# Altium PCB 剥皮器20200614.PCBDOC (part 2 of 2)
Units mil, origin at the board's own origin, x right, y up, seen from the top; angles counter-clockwise.
Board outline 5515.78 x 3626.02 mil, 4 copper layers (Top Layer, MidLayer1, MidLayer2, Bottom Layer); 100 components, 73 nets, 328 pads, 459 vias.
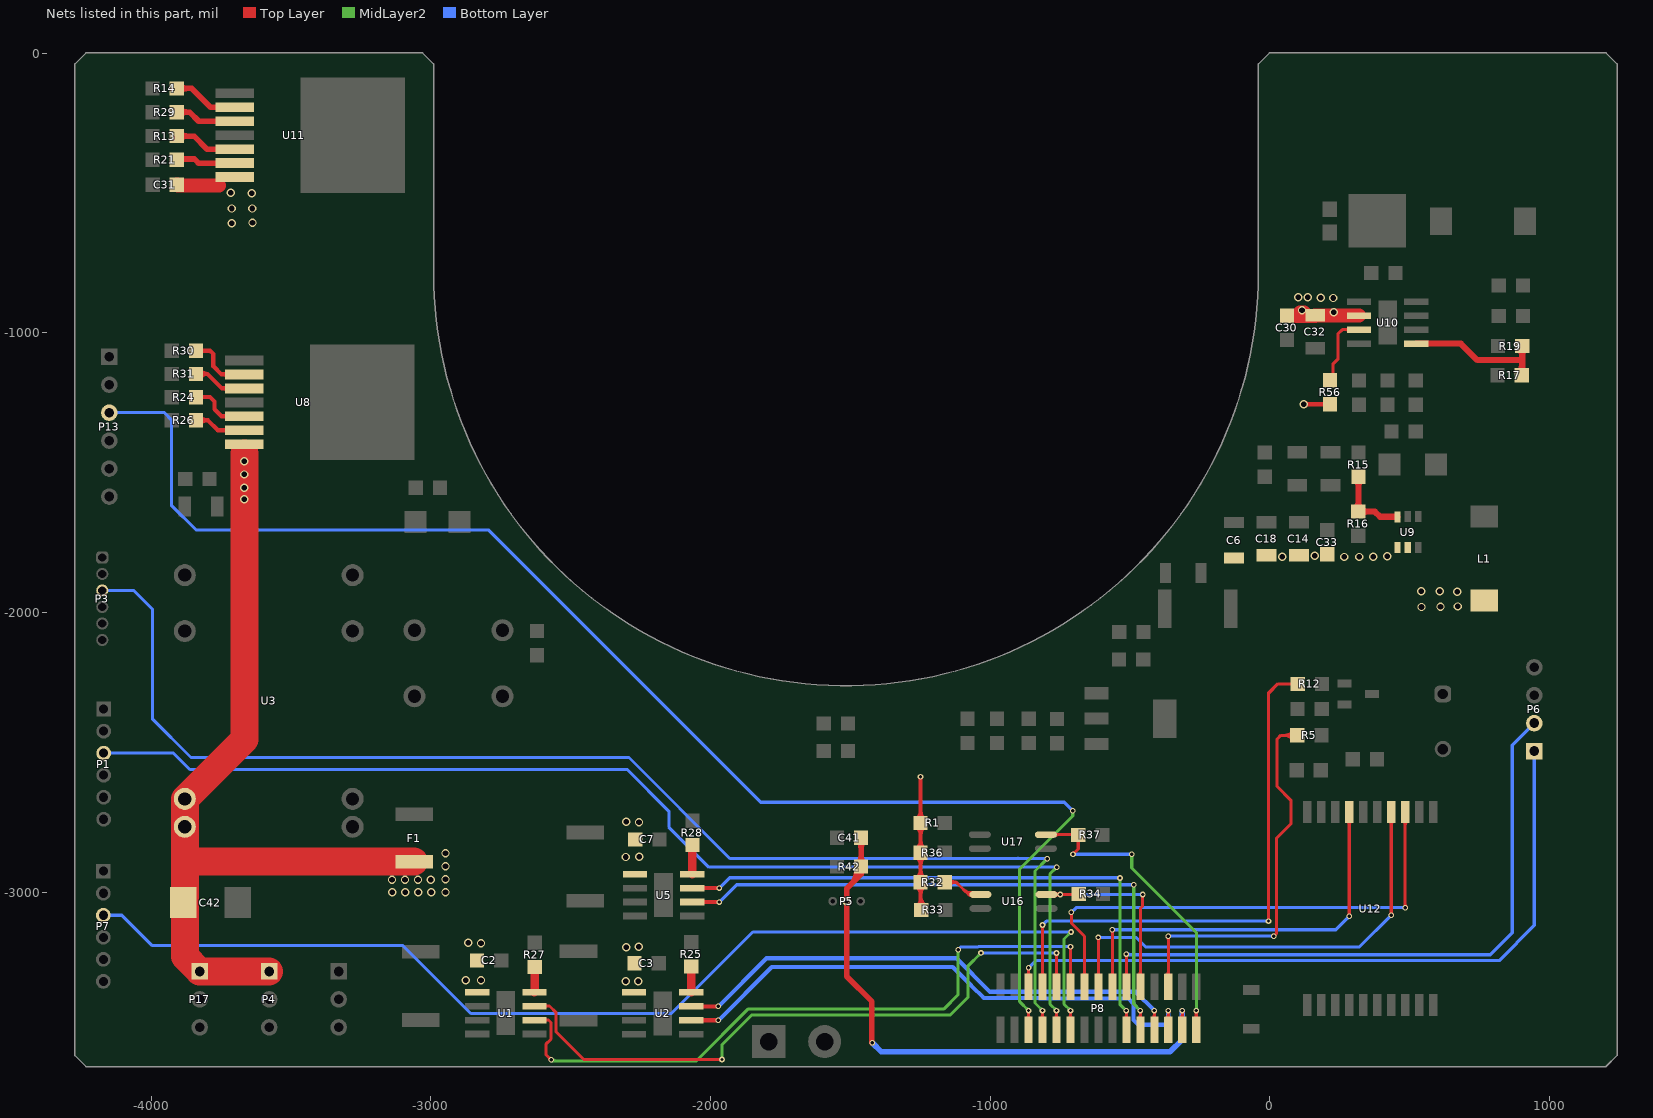
[diagram p4: the nets of this part, all layers, seen from the top]

## Via types
v1: diameter 30, hole 20, Top Layer to Bottom Layer, tented both sides, 193 vias
v2: diameter 20, hole 12, Top Layer to Bottom Layer, tented both sides, 148 vias
v3: diameter 40, hole 25, Top Layer to Bottom Layer, tented both sides, 118 vias

## Nets (pads, with @x,y where several pads share a name; then routed paths per layer and width w, separated by ;. In a path a pad name is that pad's centre, name@x,y a point inside that pad or via, vN(x,y) a via of type N, cw(c..) or ccw(c..) an arc to the next point about the centre after c; other vN are vias at no path point) (continued)
NetR13_2: R13.2 U11.5 | length 315.4
  Top Layer w20: R13.2@-3908.87,-296.01 -3846.99,-296.01 -3800,-343 U11.5@-3701,-343 ; R13.2@-3897.91,-306.97 cw(c-3871.45,-333.43) -3871.45,-296.01 cw(c-3871.45,-258.59) R13.2@-3897.91,-285.05 ; U11.5@-3757.64,-348.46 ccw(c-3770.81,-361.63) -3770.81,-343 ccw(c-3770.81,-324.37) U11.5@-3757.64,-337.54
NetR14_1: R14.1 U11.2 | length 323.8
  Top Layer w20: R14.1@-3908.87,-125.69 -3855.31,-125.69 -3788,-193 U11.2@-3701,-193 ; R14.1@-3897.91,-136.65 cw(c-3871.45,-163.11) -3871.45,-125.69 cw(c-3871.45,-88.27) R14.1@-3897.91,-114.73 ; U11.2@-3757.64,-198.46 ccw(c-3770.81,-211.63) -3770.81,-193 ccw(c-3770.81,-174.37) U11.2@-3757.64,-187.54
NetR15_2: R15.2 R16.1 U9.3 | length 439
  Top Layer w21.65: R16.1@305.62,-1628.32 ccw(c278.16,-1600.85) 317,-1600.85 ; R15.2@306.62,-1524.68 cw(c281.58,-1549.73) 317,-1549.73 cw(c352.42,-1549.73) R15.2@327.38,-1524.68 ; 317,-1605.68 ccw(c349.01,-1605.68) 326.38,-1628.32 ccw(c351.42,-1603.27) 351.42,-1638.69 ccw(c351.42,-1674.12) R16.1@326.38,-1649.07 ; R15.2@317,-1514.31 317,-1637.69 R16.1@316,-1638.69 375.69,-1638.69 394.28,-1657.28 U9.3@455.6,-1657.28
NetR17_1: R17.1 R19.2 U10.5 | length 619.5
  Top Layer w21.65: U10.5@523.36,-1038 683,-1038 742,-1097 902.31,-1097 ; R17.1@889.93,-1140.62 ccw(c860.05,-1110.75) 902.31,-1110.75 ; R19.2@891.93,-1057.38 cw(c866.88,-1082.42) 902.31,-1082.42 cw(c937.73,-1082.42) R19.2@912.68,-1057.38 ; R17.1@900.31,-1151 902.31,-1149 902.31,-1097 ; 902.31,-1120.4 ccw(c930.9,-1120.4) R17.1@910.68,-1140.62 ; R19.2@902.31,-1047 902.31,-1097
NetR21_2: R21.2 U11.6 | length 244.5
  Top Layer w20: R21.2@-3908.87,-380.69 -3906.18,-378 -3846,-378 -3831,-393 U11.6@-3701,-393 ; U11.6@-3757.64,-398.46 ccw(c-3770.81,-411.63) -3770.81,-393 ccw(c-3770.81,-374.37) U11.6@-3757.64,-387.54
NetR24_2: R24.2 U8.5 | length 256.8
  Top Layer w15: R24.2@-3840.31,-1229.5 -3789.5,-1229.5 -3774,-1245 -3774,-1273 -3749,-1298 U8.5@-3667,-1298 ; U8.5@-3725.41,-1305.22 ccw(c-3742.85,-1322.66) -3742.85,-1298 ccw(c-3742.85,-1273.34) U8.5@-3725.41,-1290.78
NetR25_2: R25.2 U2.4 | length 92.7
  Top Layer w30: R25.2@-2069,-3265.31 -2069,-3357.95 U2.4@-2068.94,-3358
NetR26_2: R26.2 U8.6 | length 293.5
  Top Layer w15: R26.2@-3840.31,-1312.5 -3797.5,-1312.5 ; R26.2@-3827.44,-1325.09 cw(c-3797.5,-1354.4) -3797.5,-1312.5 ; R26.2@-3827.44,-1299.91 ccw(c-3797.5,-1270.6) -3797.5,-1312.5 ; U8.6@-3725.41,-1355.22 ccw(c-3742.85,-1372.66) -3742.85,-1348 ccw(c-3742.85,-1323.34) U8.6@-3725.41,-1340.78 ; U8.6@-3667,-1348 -3762,-1348 -3797.5,-1312.5
NetR27_2: R27.2 U1.4 | length 90.1
  Top Layer w30: U1.4@-2629.94,-3357 -2629,-3356.06 R27.2@-2629,-3267.31
NetR28_2: R28.2 U5.4 | length 125.6
  Top Layer w30: U5.4@-2065.64,-2935 -2065.64,-2831.95 R28.2@-2065,-2831.31 ; -2065.64,-2858.2 cw(c-2038.11,-2858.2) R28.2@-2057.58,-2838.73
NetR29_1: R29.1 U11.3 | length 309.4
  Top Layer w20: R29.1@-3908.87,-210.38 -3862.62,-210.38 -3830,-243 U11.3@-3701,-243 ; R29.1@-3897.91,-221.34 cw(c-3871.45,-247.8) -3871.45,-210.38 cw(c-3871.45,-172.96) R29.1@-3897.91,-199.42 ; U11.3@-3757.64,-248.46 ccw(c-3770.81,-261.63) -3770.81,-243 ccw(c-3770.81,-224.37) U11.3@-3757.64,-237.54
NetR30_2: R30.2 U8.2 | length 272.8
  Top Layer w11.02: R30.2@-3840.31,-1063.5 R30.2@-3830,-1063.5
  Top Layer w15: R30.2@-3830,-1063.5 -3789.5,-1063.5 -3778,-1075 -3778,-1119 -3749,-1148 U8.2@-3667,-1148 ; U8.2@-3725.41,-1155.22 ccw(c-3742.85,-1172.66) -3742.85,-1148 ccw(c-3742.85,-1123.34) U8.2@-3725.41,-1140.78
NetR31_2: R31.2 U8.3 | length 297.7
  Top Layer w15: R31.2@-3840.31,-1146.5 -3798.5,-1146.5 ; R31.2@-3827.23,-1158.87 cw(c-3798.5,-1186.05) -3798.5,-1146.5 ; R31.2@-3827.23,-1134.13 ccw(c-3798.5,-1106.95) -3798.5,-1146.5 ; U8.3@-3725.41,-1205.22 ccw(c-3742.85,-1222.66) -3742.85,-1198 ccw(c-3742.85,-1173.34) U8.3@-3725.41,-1190.78 ; U8.3@-3667,-1198 -3747,-1198 -3798.5,-1146.5
NetR32_2: R32.2 U16.1 | length 307.4
  Top Layer w11.02: R32.2@-1162.69,-2964 -1122,-2964 ; R32.2@-1146.87,-2976.22 cw(c-1122,-2995.42) -1122,-2964 ; R32.2@-1146.87,-2951.78 ccw(c-1122,-2932.58) -1122,-2964 ; -1097.05,-2988.95 ccw(c-1066,-2957.91) U16.1@-1063.09,-3001.71 ; -1088,-2998 -1104.71,-2981.29 ; -1079.87,-3006.13 ccw(c-1063.86,-2990.13) U16.1@-1062.36,-3012.71 ; U16.1@-1067.12,-3012.45 ccw(c-1077.88,-3023.21) -1077.88,-3008 ccw(c-1077.88,-2992.79) U16.1@-1067.12,-3003.55 ; U16.1@-1035.11,-3008 -1078,-3008 -1104.71,-2981.29 ; -1122,-2964 -1104.71,-2981.29
NetR56_1: R56.1 U10.3 | length 282.4
  Top Layer w11.02: R56.1@215,-1168.69 225,-1158.69 225,-1112 243,-1094 243,-1004 259,-988 U10.3@318.64,-988 ; U10.3@282.69,-992.45 ccw(c271.93,-1003.21) 271.93,-988 ccw(c271.93,-972.79) U10.3@282.69,-983.55
P1_A: P1.3 P8.9 | length 4349.9
  Top Layer w11.02: P8.9@-769.59,-3452.76 ccw(c-785.05,-3437.31) -763.19,-3437.31 ccw(c-741.33,-3437.31) P8.9@-756.79,-3452.76 ; v2@-766.17,-3426.17 cw(c-773.38,-3433.38) -763.19,-3433.38 ; P8.9@-763.19,-3491.84 -763.19,-3423.19 v2(-763,-3423) ; -763.19,-3434.29 cw(c-751.71,-3434.29) v2@-759.83,-3426.17
  MidLayer2 w11.02: v2@-767.49,-3423 ccw(c-778.32,-3423) -770.66,-3415.34 ccw(c-763,-3407.68) v2@-763,-3418.51 ; v2@-766.49,-2910 cw(c-777.32,-2910) -769.66,-2917.66 cw(c-762,-2925.32) v2@-762,-2914.49 ; v2(-763,-3423) -786,-3400 -786,-2934 v2(-762,-2910)
  Bottom Layer w11.02: P1.3@-4169.99,-2502.75 -3920.25,-2502.75 -3862,-2561 -2298,-2561 -2149,-2710 -2149,-2767 -2006,-2910 -825,-2910 ; -789,-2910 -825,-2910 ; v2@-765.17,-2913.17 ccw(c-772.84,-2920.84) -772.84,-2910 ccw(c-772.84,-2899.16) v2@-765.17,-2906.83 ; v2(-762,-2910) -825,-2910
P7_A: P7.3 P8.11 | length 4348.1
  Top Layer w11.02: P8.11@-719.59,-3452.76 ccw(c-735.05,-3437.31) -713.19,-3437.31 ccw(c-691.33,-3437.31) P8.11@-706.79,-3452.76 ; v2@-716.17,-3426.17 cw(c-723.38,-3433.38) -713.19,-3433.38 ; P8.11@-713.19,-3491.84 -713.19,-3423.19 v2(-713,-3423) ; -713.19,-3434.29 cw(c-701.71,-3434.29) v2@-709.83,-3426.17
  MidLayer2 w11.02: v2@-717.49,-3423 ccw(c-728.32,-3423) -720.66,-3415.34 ccw(c-713,-3407.68) v2@-713,-3418.51 ; v2@-715.49,-3142 cw(c-726.32,-3142) -718.66,-3149.66 cw(c-711,-3157.32) v2@-711,-3146.49 ; v2(-713,-3423) -736,-3400 -736,-3167 v2(-711,-3142)
  Bottom Layer w11.02: P7.3@-4171.51,-3082.23 -4105,-3082.23 -3996.23,-3191 -3099.82,-3191 -2857.22,-3433.6 -2140.6,-3433.6 -1849,-3142 -1056,-3142 ; -1034,-3142 -1056,-3142 ; -735,-3142 -862,-3142 ; v2@-714.17,-3145.17 ccw(c-721.84,-3152.84) -721.84,-3142 ccw(c-721.84,-3131.16) v2@-714.17,-3138.83 ; v2(-711,-3142) -862,-3142 ; -1056,-3142 -862,-3142
P13_A: P8.5 P13.3 | length 5191.9
  Top Layer w11.02: P8.5@-869.59,-3452.76 ccw(c-885.05,-3437.31) -863.19,-3437.31 ccw(c-841.33,-3437.31) P8.5@-856.79,-3452.76 ; v2@-866.17,-3426.17 cw(c-873.38,-3433.38) -863.19,-3433.38 ; P8.5@-863.19,-3491.84 -863.19,-3423.19 v2(-863,-3423) ; -863.19,-3434.29 cw(c-851.71,-3434.29) v2@-859.83,-3426.17
  MidLayer2 w11.02: v2@-867.49,-3423 ccw(c-878.32,-3423) -870.66,-3415.34 ccw(c-863,-3407.68) v2@-863,-3418.51 ; v2(-863,-3423) -895,-3391 -895,-2917 -705,-2727 v2(-705,-2708) ; v2@-708.17,-2711.17 cw(c-715.84,-2718.84) -705,-2718.84 cw(c-694.16,-2718.84) v2@-701.83,-2711.17
  Bottom Layer w11.02: P13.3@-4149.91,-1285.07 -3952.93,-1285.07 -3928,-1310 -3928,-1616 -3840,-1704 -2795,-1704 -1821,-2678 -735,-2678 v2(-705,-2708) ; v2@-709.49,-2708 ccw(c-720.32,-2708) -712.66,-2700.34 ccw(c-705,-2692.68) v2@-705,-2703.51
PA2_A: P8.8 R12.2 | length 2020.8
  Top Layer w11.02: P8.8@-819.59,-3299.22 ccw(c-835.05,-3283.76) -813.19,-3283.76 ccw(c-791.33,-3283.76) P8.8@-806.79,-3299.22 ; v2@-816.36,-3120.36 cw(c-824.03,-3128.03) -813.19,-3128.03 cw(c-802.35,-3128.03) v2@-810.02,-3120.36 ; P8.8@-813.19,-3338.3 v2(-813.19,-3117.19) v2@-813,-3117
  Top Layer w12: v2@-4,-3104 v2(-5,-3103) -5,-2289 28.93,-2255.07 R12.2@99.5,-2255.07
  Bottom Layer w12: v2(-813.19,-3117.19) -799,-3103 v2(-5,-3103)
PA3_A: P3.3 P8.7 | length 4752.9
  Top Layer w11.02: P8.7@-819.59,-3452.76 ccw(c-835.05,-3437.31) -813.19,-3437.31 ccw(c-791.33,-3437.31) P8.7@-806.79,-3452.76 ; v2@-816.17,-3426.17 cw(c-823.38,-3433.38) -813.19,-3433.38 ; P8.7@-813.19,-3491.84 -813.19,-3423.19 v2(-813,-3423) ; -813.19,-3434.29 cw(c-801.71,-3434.29) v2@-809.83,-3426.17
  MidLayer2 w11.02: v2@-817.49,-3423 ccw(c-828.32,-3423) -820.66,-3415.34 ccw(c-813,-3407.68) v2@-813,-3418.51 ; v2(-813,-3423) -840,-3396 -840,-2924 v2(-796,-2880) ; v2@-800.49,-2880 cw(c-811.32,-2880) -803.66,-2887.66 cw(c-796,-2895.32) v2@-796,-2884.49
  Bottom Layer w11.02: P3.3@-4175.19,-1920.88 -4062.12,-1920.88 -3996,-1987 -3996,-2063 -3996,-2380 -3858,-2518 -2292,-2518 -1931,-2879 -902,-2879 -901,-2880 ; -900,-2878 -901,-2879 -901,-2880 ; v2@-799.17,-2883.17 ccw(c-806.84,-2890.84) -806.84,-2880 ccw(c-806.84,-2869.16) v2@-799.17,-2876.83 ; v2(-796,-2880) -901,-2880
PA6_A: P8.16 U12.4 | length 1795.3
  Top Layer w11.02: P8.16@-619.59,-3299.22 ccw(c-635.05,-3283.76) -613.19,-3283.76 ccw(c-591.33,-3283.76) P8.16@-606.79,-3299.22 ; v2@-616.36,-3164.77 cw(c-624.03,-3172.43) -613.19,-3172.43 cw(c-602.35,-3172.43) v2@-610.02,-3164.77 ; P8.16@-613.19,-3338.3 v2(-613.19,-3161.59) v2@-613,-3161.4 ; U12.4@426.57,-2744.44 cw(c409.1,-2761.92) 433.81,-2761.92 cw(c458.52,-2761.92) U12.4@441.05,-2744.44 ; v2@430.64,-3078.64 ccw(c422.97,-3070.97) 433.81,-3070.97 ccw(c444.65,-3070.97) v2@436.98,-3078.64 ; U12.4@433.81,-2713.58 v2(433.81,-3081.81) v2@434,-3082
  Bottom Layer w11.02: v2@-613.19,-3161.4 -478.6,-3161.4 -444,-3196 319.62,-3196 v2(433.81,-3081.81) ; v2@-610.02,-3164.77 cw(c-601.9,-3172.89) -601.9,-3161.4 ; v2@-610.02,-3158.42 ccw(c-602.81,-3151.22) -602.81,-3161.4 ; v2@429.32,-3081.81 cw(c418.49,-3081.81) 426.15,-3089.47 cw(c433.81,-3097.13) v2@433.81,-3086.3
PB5_A: P8.25 U2.2 | length 2069.4
  Top Layer w11.02: P8.25@-369.59,-3452.76 ccw(c-385.05,-3437.31) -363.19,-3437.31 ccw(c-341.33,-3437.31) P8.25@-356.79,-3452.76 ; v2@-366.17,-3426.17 cw(c-373.38,-3433.38) -363.19,-3433.38 ; P8.25@-363.19,-3491.84 -363.19,-3423.19 v2(-363,-3423) ; -363.19,-3434.29 cw(c-351.71,-3434.29) v2@-359.83,-3426.17
  Top Layer w15: U2.2@-2068.94,-3458 v2(-1972.31,-3458)
  Bottom Layer w15: v2(-1972.31,-3458) -1781.31,-3267 -1134,-3267 -1074,-3327 -1066.5,-3334.5 -1022.91,-3378.09 -826.91,-3378.09 -825,-3380 -506,-3380 -487,-3399 -487,-3412.23 -487.59,-3412.82 -487.59,-3456.41 -470,-3474 -375.19,-3474 -363.19,-3462 -363.19,-3423.19 v2(-363,-3423)
PB6_A: P8.10 U1.3 | length 2515.2
  Top Layer w11.02: U1.3@-2629.95,-3407 -2576,-3407 -2552.23,-3430.77 -2552.23,-3499.77 -2454.4,-3597.6 -1959.4,-3597.6 v2(-1959,-3598) ; U1.3@-2593.99,-3411.45 cw(c-2583.24,-3422.21) -2583.24,-3407 cw(c-2583.24,-3391.79) U1.3@-2593.99,-3402.55 ; -1970.81,-3597.6 cw(c-1970.81,-3609.81) v2@-1962.17,-3601.17 ; P8.10@-769.59,-3299.22 ccw(c-785.05,-3283.76) -763.19,-3283.76 ccw(c-741.33,-3283.76) P8.10@-756.79,-3299.22 ; v2@-766.36,-3220.36 cw(c-774.03,-3228.03) -763.19,-3228.03 cw(c-752.35,-3228.03) v2@-760.02,-3220.36 ; P8.10@-763.19,-3338.3 v2(-763.19,-3217.19) v2@-763,-3217
  MidLayer2 w11.02: v2@-1962.17,-3594.83 ccw(c-1969.84,-3587.16) -1959,-3587.16 ccw(c-1948.16,-3587.16) v2@-1955.83,-3594.83 ; v2(-1959,-3598) -1959,-3545 -1853,-3439 -1143,-3439 -1080,-3376 -1080,-3264 v2(-1033,-3217) ; v2@-1037.49,-3217 cw(c-1048.32,-3217) -1040.66,-3224.66 cw(c-1033,-3232.32) v2@-1033,-3221.49
  Bottom Layer w11.02: v2(-1033,-3217) v2@-763,-3217 ; v2@-1029.83,-3220.17 cw(c-1022.16,-3227.84) -1022.16,-3217 cw(c-1022.16,-3206.16) v2@-1029.83,-3213.83 ; -774.48,-3217 cw(c-774.48,-3228.48) v2@-766.36,-3220.36 ; -773.57,-3217 ccw(c-773.57,-3206.81) v2@-766.36,-3214.02
PB7_A: P8.12 U1.2 | length 2627.8
  Top Layer w11.02: U1.2@-2629.94,-3457 -2579.34,-3457 -2570.34,-3466 -2570.34,-3525.34 -2589,-3544 -2589,-3580 v2(-2570.34,-3598.66) ; U1.2@-2593.99,-3461.45 cw(c-2583.24,-3472.21) -2583.24,-3457 cw(c-2583.24,-3441.79) U1.2@-2593.99,-3452.55 ; v2@-2574.83,-3598.66 ccw(c-2585.66,-3598.66) -2578,-3591 ccw(c-2570.34,-3583.34) v2@-2570.34,-3594.17 ; P8.12@-719.59,-3299.22 ccw(c-735.05,-3283.76) -713.19,-3283.76 ccw(c-691.33,-3283.76) P8.12@-706.79,-3299.22 ; v2@-716.17,-3197.58 cw(c-723.38,-3204.78) -713.19,-3204.78 ; P8.12@-713.19,-3338.3 v2@-713.19,-3194.59 ; -713.19,-3205.7 cw(c-701.71,-3205.7) v2@-709.83,-3197.58
  MidLayer2 w11.02: v2(-2570.34,-3598.66) -2565.16,-3603.84 -2051.84,-3603.84 -1865,-3417 -1165,-3417 -1115,-3367 v2(-1115,-3205) ; v2@-2567.16,-3595.49 ccw(c-2547,-3575.33) -2547,-3603.84 ; v2@-1118.17,-3208.17 cw(c-1125.84,-3215.84) -1115,-3215.84 cw(c-1104.16,-3215.84) v2@-1111.83,-3208.17
  Bottom Layer w11.02: v2(-1115,-3205) -1105.6,-3195.6 -1043.56,-3195.6 -1042.36,-3194.4 -754.02,-3194.4 v2(-713,-3194.4) ; v2@-716.17,-3197.58 ccw(c-723.84,-3205.24) -723.84,-3194.4 ccw(c-723.84,-3183.57) v2@-716.17,-3191.23
PE3_A: P8.19 U5.3 | length 2159.1
  Top Layer w11.02: P8.19@-519.59,-3452.76 ccw(c-535.05,-3437.31) -513.19,-3437.31 ccw(c-491.33,-3437.31) P8.19@-506.79,-3452.76 ; v2@-516.17,-3426.17 cw(c-523.38,-3433.38) -513.19,-3433.38 ; P8.19@-513.19,-3491.84 -513.19,-3423.19 v2(-513,-3423) ; -513.19,-3434.29 cw(c-501.71,-3434.29) v2@-509.83,-3426.17
  Top Layer w15: U5.3@-2065.64,-2985 v2(-1969,-2985)
  MidLayer2 w12: v2(-536,-2949) -536.09,-2949.09 -536.09,-3399.91 v2(-513,-3423)
  Bottom Layer w12: v2(-1969,-2985) -1932,-2948 v2@-536,-2948 ; -548.07,-2948 cw(c-548.07,-2961.07) v2@-538.83,-2951.83
PE5: P8.22 R34.1 U16.4 | length 882.6
  Top Layer w11.02: U16.4@-798.89,-3008 -685.31,-3008 R34.1@-683.31,-3006 ; U16.4@-766.88,-3012.45 cw(c-756.12,-3023.21) -756.12,-3008 cw(c-756.12,-2992.79) U16.4@-766.88,-3003.55 ; v2@-753.17,-3011.17 ccw(c-760.84,-3018.84) -760.84,-3008 ccw(c-760.84,-2997.16) v2@-753.17,-3004.83 ; v2@-746.83,-3011.17 cw(c-739.16,-3018.84) -739.16,-3008 cw(c-739.16,-2997.16) v2@-746.83,-3004.83 ; P8.22@-469.59,-3299.22 ccw(c-485.05,-3283.76) -463.19,-3283.76 ccw(c-441.33,-3283.76) P8.22@-456.79,-3299.22 ; P8.22@-463.19,-3338.3 -463.19,-3058.19 -456,-3051 -456,-3009 v2(-455,-3008) ; -456,-3021.25 cw(c-441.75,-3021.25) v2@-451.83,-3011.17
  Bottom Layer w11.02: v2(-750,-3008) v2(-455,-3008) ; v2@-746.83,-3011.17 cw(c-739.16,-3018.84) -739.16,-3008 cw(c-739.16,-2997.16) v2@-746.83,-3004.83 ; v2@-458.17,-3011.17 ccw(c-465.84,-3018.84) -465.84,-3008 ccw(c-465.84,-2997.16) v2@-458.17,-3004.83
PG5_A: P8.21 U5.2 | length 2184.5
  Top Layer w11.02: P8.21@-469.59,-3452.76 ccw(c-485.05,-3437.31) -463.19,-3437.31 ccw(c-441.33,-3437.31) P8.21@-456.79,-3452.76 ; v2@-466.17,-3426.17 cw(c-473.38,-3433.38) -463.19,-3433.38 ; P8.21@-463.19,-3491.84 -463.19,-3423.19 v2(-463,-3423) ; -463.19,-3434.29 cw(c-451.71,-3434.29) v2@-459.83,-3426.17
  Top Layer w15: U5.2@-2065.64,-3035 v2(-1969,-3035)
  MidLayer2 w12: v2(-487,-2973) -487,-2978 -487,-3258 -487,-3399 v2(-463,-3423)
  Bottom Layer w12: v2(-1969,-3035) -1907,-2973 v2(-487,-2973)
PH0_RXD2_A: P8.18 U12.7 | length 1584.8
  Top Layer w11.02: P8.18@-569.59,-3299.22 ccw(c-585.05,-3283.76) -563.19,-3283.76 ccw(c-541.33,-3283.76) P8.18@-556.79,-3299.22 ; v2@-566.36,-3137.17 cw(c-574.03,-3144.84) -563.19,-3144.84 cw(c-552.35,-3144.84) v2@-560.02,-3137.17 ; P8.18@-563.19,-3338.3 v2(-563.19,-3134) ; U12.7@276.57,-2744.44 cw(c259.1,-2761.92) 283.81,-2761.92 cw(c308.52,-2761.92) U12.7@291.05,-2744.44 ; v2@280.64,-3082.83 ccw(c272.97,-3075.16) 283.81,-3075.16 ccw(c294.65,-3075.16) v2@286.98,-3082.83 ; v2(283.81,-3086) U12.7@283.81,-2713.58
  Bottom Layer w11.02: v2(-563.19,-3134) 235.81,-3134 v2(283.81,-3086) ; v2@-560.02,-3137.17 cw(c-552.35,-3144.84) -552.35,-3134 cw(c-552.35,-3123.16) v2@-560.02,-3130.83 ; v2@279.32,-3086 cw(c268.49,-3086) 276.15,-3093.66 cw(c283.81,-3101.32) v2@283.81,-3090.49
PH1_TXD2: P8.26 R5.1 | length 1541.6
  Top Layer w11.02: P8.26@-369.59,-3299.22 ccw(c-385.05,-3283.76) -363.19,-3283.76 ccw(c-341.33,-3283.76) P8.26@-356.79,-3299.22 ; v2@-367.17,-3160.17 cw(c-376.79,-3169.79) -363.19,-3169.79 ; P8.26@-363.19,-3338.3 v2@-363.19,-3157.19 ; v2(14,-3157) 23,-3148 23,-2808 75,-2756 75,-2671 26,-2622 26,-2452 39,-2439 R5.1@97.69,-2439 ; R5.1@83.56,-2453.13 ccw(c49.44,-2487.26) 49.44,-2439 ccw(c49.44,-2390.74) R5.1@83.56,-2424.87
  Bottom Layer w11.02: v2(-364,-3157) v2(14,-3157) ; v2@-360.83,-3160.17 cw(c-353.16,-3167.84) -353.16,-3157 cw(c-353.16,-3146.16) v2@-360.83,-3153.83 ; v2@10.83,-3160.17 ccw(c3.16,-3167.84) 3.16,-3157 ccw(c3.16,-3146.16) v2@10.83,-3153.83
PH5_A: P8.23 U2.3 | length 1924.9
  Top Layer w11.02: P8.23@-419.59,-3452.76 ccw(c-435.05,-3437.31) -413.19,-3437.31 ccw(c-391.33,-3437.31) P8.23@-406.79,-3452.76 ; v2@-416.17,-3426.17 cw(c-423.38,-3433.38) -413.19,-3433.38 ; P8.23@-413.19,-3491.84 -413.19,-3423.19 v2(-413,-3423) ; -413.19,-3434.29 cw(c-401.71,-3434.29) v2@-409.83,-3426.17
  Top Layer w15: U2.3@-2068.95,-3408 v2(-1972.31,-3408)
  Bottom Layer w15: v2(-1972.31,-3408) -1800.31,-3236 -1121,-3236 -1001,-3356 -480,-3356 v2(-413,-3423)
PJ0_RX3_A: P6.2 P8.20 | length 2376.4
  Top Layer w11.02: P8.20@-519.59,-3299.22 ccw(c-535.05,-3283.76) -513.19,-3283.76 ccw(c-491.33,-3283.76) P8.20@-506.79,-3299.22 ; v2@-516.17,-3224.17 cw(c-523.38,-3231.38) -513.19,-3231.38 ; P8.20@-513.19,-3338.3 -513.19,-3221.19 v2(-513,-3221) ; -513.19,-3232.29 cw(c-501.71,-3232.29) v2@-509.83,-3224.17
  Bottom Layer w12: v2(-513,-3221) -511,-3223 788.37,-3223 867,-3144.37 867,-2473.81 P6.2@945.35,-2395.46 ; v2@-510.17,-3218.17 ccw(c-498.51,-3206.51) -498.51,-3223
PJ1_A: P6.1 P8.6 | length 2614.3
  Top Layer w11.02: P8.6@-869.59,-3299.22 ccw(c-885.05,-3283.76) -863.19,-3283.76 ccw(c-841.33,-3283.76) P8.6@-856.79,-3299.22 ; v2@-866.17,-3272.63 cw(c-873.38,-3279.83) -863.19,-3279.83 ; P8.6@-863.19,-3338.3 -863.19,-3269.65 v2(-863,-3269.46) ; -863.19,-3280.75 cw(c-851.71,-3280.75) v2@-859.83,-3272.63
  Bottom Layer w12: v2(-863,-3269.46) -837.77,-3244.23 819.77,-3244.23 945.35,-3118.65 P6.1@945.35,-2495.46
PK1: P8.29 R37.1 U17.4 | length 1287.7
  Top Layer w11.02: U17.4@-800.89,-2794 -686.31,-2794 R37.1@-685.31,-2795 -685.31,-2845.31 v2(-704,-2864) v2@-703,-2864 ; U17.4@-768.88,-2798.45 cw(c-758.12,-2809.21) -758.12,-2794 cw(c-758.12,-2778.79) U17.4@-768.88,-2789.55 ; v2@-704,-2859.51 ccw(c-704,-2848.68) -696.34,-2856.34 ccw(c-688.68,-2864) v2@-699.51,-2864 ; P8.29@-269.59,-3452.76 ccw(c-285.05,-3437.31) -263.19,-3437.31 ccw(c-241.33,-3437.31) P8.29@-256.79,-3452.76 ; v2@-266.17,-3426.17 cw(c-273.38,-3433.38) -263.19,-3433.38 ; P8.29@-263.19,-3491.84 -263.19,-3423.19 v2(-263,-3423) ; -263.19,-3434.29 cw(c-251.71,-3434.29) v2@-259.83,-3426.17
  MidLayer2 w11.02: v2@-497.17,-2867.17 cw(c-504.84,-2874.84) -494,-2874.84 cw(c-483.16,-2874.84) v2@-490.83,-2867.17 ; v2(-494,-2864) -494,-2913 -263,-3144 v2(-263,-3423) ; v2@-266.17,-3419.83 ccw(c-273.84,-3412.16) -263,-3412.16 ccw(c-252.16,-3412.16) v2@-259.83,-3419.83
  Bottom Layer w11.02: v2(-704,-2864) v2(-494,-2864) ; v2@-700.83,-2867.17 cw(c-693.16,-2874.84) -693.16,-2864 cw(c-693.16,-2853.16) v2@-700.83,-2860.83 ; v2@-497.17,-2867.17 ccw(c-504.84,-2874.84) -504.84,-2864 ccw(c-504.84,-2853.16) v2@-497.17,-2860.83
PK3_A: P8.14 U12.3 | length 1963.5
  Top Layer w11.02: v2@-713.17,-3075.17 cw(c-723.25,-3085.25) -709,-3085.25 ; v2(-710,-3072) -709,-3073 -709,-3112 -663.19,-3157.81 -663.19,-3269.65 P8.14@-663.19,-3338.3 ; P8.14@-669.59,-3299.22 ccw(c-685.05,-3283.76) -663.19,-3283.76 ccw(c-641.33,-3283.76) P8.14@-656.79,-3299.22 ; U12.3@476.57,-2744.44 cw(c459.1,-2761.92) 483.81,-2761.92 cw(c508.52,-2761.92) U12.3@491.05,-2744.44 ; v2@480.64,-3051.64 ccw(c472.97,-3043.97) 483.81,-3043.97 ccw(c494.65,-3043.97) v2@486.98,-3051.64 ; U12.3@483.81,-2713.58 v2(483.81,-3054.81) v2@484,-3055
  Bottom Layer w11.02: v2(-710,-3072) -692.81,-3054.81 v2(483.81,-3054.81) ; v2@-710,-3067.51 ccw(c-710,-3056.68) -702.34,-3064.34 ccw(c-694.68,-3072) v2@-705.51,-3072 ; v2@480.64,-3057.98 ccw(c472.97,-3065.65) 472.97,-3054.81 ccw(c472.97,-3043.97) v2@480.64,-3051.64
VCC: C2.1 C3.1 C6.1 C7.1 C14.1 C18.1 C30.2 C31.1 C32.1 C33.2 C42.1 F1.1 L1.1 P4.1 P17.1 R1.1 R32.1 R33.1 R36.1 R56.2 U1.5 U2.5 U3.22 U3.23 U5.5 U8.7 U9.4 U9.5 U10.2 U11.7 | length 4558.8
  Top Layer w15: R32.1@-1262.04,-2976.73 cw(c-1292.76,-3007.46) -1249.31,-3007.46 cw(c-1205.85,-3007.46) R32.1@-1236.58,-2976.73 ; R32.1@-1262.04,-2951.27 ccw(c-1292.76,-2920.54) -1249.31,-2920.54 ccw(c-1205.85,-2920.54) R32.1@-1236.58,-2951.27 ; R36.1@-1262.04,-2871.73 cw(c-1292.76,-2902.46) -1249.31,-2902.46 cw(c-1205.85,-2902.46) R36.1@-1236.58,-2871.73 ; R36.1@-1262.04,-2846.27 ccw(c-1292.76,-2815.54) -1249.31,-2815.54 ccw(c-1205.85,-2815.54) R36.1@-1236.58,-2846.27 ; R1.1@-1262.04,-2764.73 cw(c-1292.76,-2795.46) -1249.31,-2795.46 cw(c-1205.85,-2795.46) R1.1@-1236.58,-2764.73 ; R1.1@-1262.04,-2739.27 ccw(c-1292.76,-2708.54) -1249.31,-2708.54 ccw(c-1205.85,-2708.54) R1.1@-1236.58,-2739.27 ; R33.1@-1259.04,-3050.27 ccw(c-1282.52,-3026.79) -1249.31,-3026.79 ; -1249.31,-3012.3 ccw(c-1195.61,-3012.3) R33.1@-1233.58,-3050.27 ; v2@-1249,-2587 v2(-1249.31,-2587.31) R1.1@-1249.31,-2752 -1249.31,-3060 R33.1@-1246.31,-3063 ; v1@121,-1255 132,-1255 132.31,-1255.31 R56.2@215,-1255.31 ; v1@126.3,-1260.61 cw(c139.11,-1273.41) 139.11,-1255.31 cw(c139.11,-1237.2) v1@126.3,-1250
  Top Layer w50: C31.1@-3908.49,-469.69 -3905.18,-473 -3757,-473 ; C30.2@61,-938.69 160.65,-938.69 C32.1@162,-937.34 162.66,-938 U10.2@318.64,-938 ; 91.43,-938.69 ccw(c91.43,-895.71) v1@121.83,-926.1 ; v1@107.68,-926.1 ccw(c138.08,-895.71) C32.1@138.08,-938.69
  Top Layer w100: -3851.35,-2890.65 F1.1@-3060,-2890.65 ; -3667,-1431 v1(-3667,-1459) v1(-3667,-1506) v1(-3667,-1553) v1(-3667,-1594) -3667,-2453 U3.22@-3880,-2666 U3.23@-3880,-2766 -3880,-3229.76 P17.1@-3826.69,-3283.07 P4.1@-3578.2,-3283.07
  other v1: -2304,-3318 -2258,-3318 -2875,-3314 -2821,-3314 -2302,-3196 -2257,-3195 -2821,-3182 -2867,-3181 -3138,-3000 -3091.67,-3000 -3045.33,-3000 -2999,-3000 -2948,-3000 -3139,-2955 -3092.67,-2955 -3046.33,-2955 -3000,-2955 -2948,-2953.67 -2948,-2907.33 -2304,-2874 -2255,-2873 -2948,-2861 -2256,-2749 -2302,-2748 542,-1980 610,-1979 672,-1978 670,-1925 541,-1923 607,-1923 266,-1801 319,-1801 44,-1800 370,-1800 419,-1799 160.16,-1796.84 121,-1255.31 229,-926 114.76,-919.03 226,-875 182,-874 101,-873 136,-873 -3712,-608 -3638,-606 -3712,-555 -3639,-555 -3640,-500 -3716,-499
霍尔: C41.1 P5.2 P8.27 R42.2 | length 2419.2
  Top Layer w11.02: P8.27@-319.59,-3452.76 ccw(c-335.05,-3437.31) -313.19,-3437.31 ccw(c-291.33,-3437.31) P8.27@-306.79,-3452.76 ; v2@-316.17,-3426.17 cw(c-323.38,-3433.38) -313.19,-3433.38 ; P8.27@-313.19,-3491.84 -313.19,-3423.19 v2(-313,-3423) ; -313.19,-3434.29 cw(c-301.71,-3434.29) v2@-309.83,-3426.17
  Top Layer w20: -1499.34,-2973.34 ccw(c-1554.23,-2918.45) R42.2@-1477.1,-2909.74 ; R42.2@-1472.65,-2897.04 ccw(c-1499.11,-2870.58) -1461.69,-2870.58 ccw(c-1424.27,-2870.58) R42.2@-1450.73,-2897.04 ; C41.1@-1472.65,-2815.96 cw(c-1499.11,-2842.42) -1461.69,-2842.42 cw(c-1424.27,-2842.42) C41.1@-1450.73,-2815.96 ; -1469.98,-2943.98 ccw(c-1501.47,-2912.49) R42.2@-1457.22,-2907.49 ; R42.2@-1469.8,-2921.21 cw(c-1478.68,-2935.69) -1461.69,-2935.69 ; C41.1@-1461.69,-2805 R42.2@-1461.69,-2908 -1461.69,-2935.69 ; R42.2@-1453.59,-2921.21 ccw(c-1444.71,-2935.69) -1461.69,-2935.69 ; v2(-1422,-3538) -1423,-3538 -1423,-3391 -1513.19,-3300.81 P5.2@-1513.19,-3032.07 -1513.19,-2987.19 -1461.69,-2935.69
  Bottom Layer w20: v2(-1422,-3538) -1389,-3571 -358,-3571 -313,-3526 v2(-313,-3423)
pads on no net: P1.4 P3.4 P7.4 P13.4 U3.9 U3.11 U9.6 U12.2 U12.8 U12.12 U12.13 U12.14 U12.15 U12.16 U12.17 U12.18 U12.19

## Polygon pours and split planes (outlines as drawn)
AGND on MidLayer1 "Top Layer-No Net" (solid, remove dead copper, pour order 1000): -2636,-1819 -2636,-1818 -349,-1818 -349,-2411 -349,-2464 313,-2464 457,-2464 457,-2539 457,-2644 613,-2644 621,-2644 621,-2750 621,-2857 163,-2857 -689,-2857 -689,-2948 -689,-3396.72 -1054,-3396.72 -1054,-3092.72 -1054,-3092 -1493.4,-3092 -1493.4,-2977 -1054,-2977 -1054,-2599 -1054,-2591 -2882,-2591 -2882,-2164.72 -2882,-2164 -3229,-2164 -3229,-2552 -3983,-2552 -3983,-1380 -3697,-1380 -3697,-1814.19 -3697,-1815 -2601,-1815
GND on MidLayer1 "Top Layer-No Net" (solid, remove dead copper, pour order 1001): -1126,-3162.83 -1126,-3499 -618.65,-3499 -618.65,-2946 -618.65,-2944 26,-2944 42,-2944 42,-3001 42,-3386 104,-3386 212,-3386 212,-3332 212,-2991.81 151.67,-2991.81 151,-2991.81 151,-2945 151,-2947 418,-2947 420,-2947 420,-3013 420,-3034.09 475.23,-3034.09 479,-3034.09 479,-3102 479,-3112 523,-3112 522,-3112 522,-3218 522,-3395 586,-3395 646,-3395 646,-3367 646,-2924 670,-2924 669,-2924 669,-2849 669,-2601 597,-2601 513,-2601 513,-2480.99 513,-2419 -257,-2419 -257,-1709 -257,-1717 -365,-1717 -305,-1717 -305,321 -305,300 1387,300 1906,300 1906,-3830 1906,-3841 -4571,-3841 -4456,-3841 -4456,456 -4456,133 -2423,133 -2551,133 -2551,-1707 -2551,-1704.33 -3603.65,-1704.33 -3614,-1704.33 -3614,-1252 -3614,-1248.8 -4095.65,-1248.8 -4095.65,-2620.82 -3136.65,-2620.82 -3136.65,-2225.82 -2972.65,-2225.82 -2972.65,-2678.82 -2972.65,-2679.41 -1137.65,-2679.41 -1137.65,-2921.91 -1617.65,-2921.91 -1617.65,-3153.26 -1617.65,-3154 -1126,-3154 -1126,-3178.69
AGND on MidLayer2 "Top Layer-No Net" (solid, remove dead copper, pour order 1002): -2636,-1819 -2636,-1818 -349,-1818 -349,-2411 -349,-2464 313,-2464 457,-2464 457,-2539 457,-2644 613,-2644 621,-2644 621,-2750 621,-2857 163,-2857 -689,-2857 -689,-2948 -689,-3396.72 -1054,-3396.72 -1054,-3092.72 -1054,-3092 -1493.4,-3092 -1493.4,-2977 -1054,-2977 -1054,-2599 -1054,-2591 -2882,-2591 -2882,-2164.72 -2882,-2164 -3229,-2164 -3229,-2552 -3983,-2552 -3983,-1380 -3697,-1380 -3697,-1814.19 -3697,-1815 -2601,-1815
GND on MidLayer2 "Top Layer-No Net" (solid, remove dead copper, pour order 1003): -1126,-3162.83 -1126,-3499 -618.65,-3499 -618.65,-2946 -618.65,-2944 26,-2944 42,-2944 42,-3001 42,-3386 104,-3386 212,-3386 212,-3332 212,-2991.81 151.67,-2991.81 151,-2991.81 151,-2945 151,-2947 418,-2947 420,-2947 420,-3013 420,-3034.09 475.23,-3034.09 479,-3034.09 479,-3102 479,-3112 523,-3112 522,-3112 522,-3218 522,-3395 586,-3395 646,-3395 646,-3367 646,-2924 670,-2924 669,-2924 669,-2849 669,-2601 597,-2601 513,-2601 513,-2480.99 513,-2419 -257,-2419 -257,-1709 -257,-1717 -365,-1717 -305,-1717 -305,321 -305,300 1387,300 1906,300 1906,-3830 1906,-3841 -4571,-3841 -4456,-3841 -4456,456 -4456,133 -2423,133 -2551,133 -2551,-1707 -2551,-1704.33 -3603.65,-1704.33 -3614,-1704.33 -3614,-1252 -3614,-1248.8 -4095.65,-1248.8 -4095.65,-2620.82 -3136.65,-2620.82 -3136.65,-2225.82 -2972.65,-2225.82 -2972.65,-2678.82 -2972.65,-2679.41 -1137.65,-2679.41 -1137.65,-2921.91 -1617.65,-2921.91 -1617.65,-3153.26 -1617.65,-3154 -1126,-3154 -1126,-3178.69
AGND on Bottom Layer "Top Layer-No Net" (solid, remove dead copper, pour order 1004): -2636,-1819 -2636,-1818 -349,-1818 -349,-2411 -349,-2464 313,-2464 457,-2464 457,-2539 457,-2644 613,-2644 621,-2644 621,-2750 621,-2857 163,-2857 -689,-2857 -689,-2948 -689,-3396.72 -1054,-3396.72 -1054,-3092.72 -1054,-3092 -1493.4,-3092 -1493.4,-2977 -1054,-2977 -1054,-2599 -1054,-2591 -2882,-2591 -2882,-2164.72 -2882,-2164 -3229,-2164 -3229,-2552 -3983,-2552 -3983,-1380 -3697,-1380 -3697,-1814.19 -3697,-1815 -2601,-1815
GND on Bottom Layer "Top Layer-No Net" (solid, remove dead copper, pour order 1005): -1126,-3162.83 -1126,-3499 -618.65,-3499 -618.65,-2946 -618.65,-2944 26,-2944 42,-2944 42,-3001 42,-3386 104,-3386 212,-3386 212,-3332 212,-2991.81 151.67,-2991.81 151,-2991.81 151,-2945 151,-2947 418,-2947 420,-2947 420,-3013 420,-3034.09 475.23,-3034.09 479,-3034.09 479,-3102 479,-3112 523,-3112 522,-3112 522,-3218 522,-3395 586,-3395 646,-3395 646,-3367 646,-2924 670,-2924 669,-2924 669,-2849 669,-2601 597,-2601 513,-2601 513,-2480.99 513,-2419 -257,-2419 -257,-1709 -257,-1717 -365,-1717 -305,-1717 -305,321 -305,300 1387,300 1906,300 1906,-3830 1906,-3841 -4571,-3841 -4456,-3841 -4456,456 -4456,133 -2423,133 -2551,133 -2551,-1707 -2551,-1704.33 -3603.65,-1704.33 -3614,-1704.33 -3614,-1252 -3614,-1248.8 -4095.65,-1248.8 -4095.65,-2620.82 -3136.65,-2620.82 -3136.65,-2225.82 -2972.65,-2225.82 -2972.65,-2678.82 -2972.65,-2679.41 -1137.65,-2679.41 -1137.65,-2921.91 -1617.65,-2921.91 -1617.65,-3153.26 -1617.65,-3154 -1126,-3154 -1126,-3178.69
AGND on Top Layer "Top Layer-No Net" (solid, remove dead copper, pour order 1006): -2636,-1819 -2636,-1818 -349,-1818 -349,-2411 -349,-2464 313,-2464 457,-2464 457,-2539 457,-2644 613,-2644 621,-2644 621,-2750 621,-2857 163,-2857 -689,-2857 -689,-2948 -689,-3396.72 -1054,-3396.72 -1054,-3092.72 -1054,-3092 -1493.4,-3092 -1493.4,-2977 -1054,-2977 -1054,-2599 -1054,-2591 -2882,-2591 -2882,-2164.72 -2882,-2164 -3229,-2164 -3229,-2552 -3983,-2552 -3983,-1380 -3697,-1380 -3697,-1814.19 -3697,-1815 -2601,-1815
GND on Top Layer "Top Layer-No Net" (solid, remove dead copper, pour order 1007): -1126,-3162.83 -1126,-3499 -618.65,-3499 -618.65,-2946 -618.65,-2944 26,-2944 42,-2944 42,-3001 42,-3386 104,-3386 212,-3386 212,-3332 212,-2991.81 151.67,-2991.81 151,-2991.81 151,-2945 151,-2947 418,-2947 420,-2947 420,-3013 420,-3034.09 475.23,-3034.09 479,-3034.09 479,-3102 479,-3112 523,-3112 522,-3112 522,-3218 522,-3395 586,-3395 646,-3395 646,-3367 646,-2924 670,-2924 669,-2924 669,-2849 669,-2601 597,-2601 513,-2601 513,-2480.99 513,-2419 -257,-2419 -257,-1709 -257,-1717 -365,-1717 -305,-1717 -305,321 -305,300 1387,300 1906,300 1906,-3830 1906,-3841 -4571,-3841 -4456,-3841 -4456,456 -4456,133 -2423,133 -2551,133 -2551,-1707 -2551,-1704.33 -3603.65,-1704.33 -3614,-1704.33 -3614,-1252 -3614,-1248.8 -4095.65,-1248.8 -4095.65,-2620.82 -3136.65,-2620.82 -3136.65,-2225.82 -2972.65,-2225.82 -2972.65,-2678.82 -2972.65,-2679.41 -1137.65,-2679.41 -1137.65,-2921.91 -1617.65,-2921.91 -1617.65,-3153.26 -1617.65,-3154 -1126,-3154 -1126,-3178.69

## Keep-outs
Keep-Out Layer:
  circle w3.94: c-2716.54,-2867.23 r62.99
  circle w3.94: c479.45,-172.23 r62.99
  circle w3.94: c-3916.34,-787.4 r62.99
  circle w3.94: c-313.98,-2867.23 r62.99
  circle w3.94: c-3917.32,-787.4 r62.99
  circle w3.94: c-314.96,-2867.23 r62.99
  lines w3.94: -1375,-3622.05 1200.79,-3622.05 ; -1323.19,-3622.05 -1665.98,-3622.05 -4232.29,-3622.05 -4271.66,-3582.68 -4271.66,-39.37 -4232.29,0 -3031.5,0 -2992.13,-39.37 -2992.13,-787.4 ccw(c-1515.75,-787.4) -39.37,-787.4 -39.37,-39.37 0,0 1200.79,0 1240.16,-39.37 1240.16,-3582 1200.79,-3621.37

## Other copper
Top Layer:
  rectangle net VCC: 525,-2017 828,-1905
  rectangle net VCC: 404,-1838 504,-1746
  rectangle net VCC: -172,-1837 418,-1765
  rectangle net VCC: 72,-957 245,-855
  rectangle net NetP13_6: -3496,-1651 -3185,-1351
  rectangle net VCC: -3772,-665 -3609,-423
  rectangle net VCC: -3157,-3020 -2906,-2842
  rectangle net +5V: -280,-3390 -187,-3258
  rectangle net AGND: -1010,-3386 -897,-3252
  rectangle net GND: 387,-1089 454,-884
  rectangle net GND: -2200,-3136 -2134,-2892
  rectangle net GND: -2206,-3566 -2136,-3320
  rectangle net GND: -2773,-3586 -2693,-3289
  rectangle net GND: -433,-3385 -397,-3247
  region net +15V: 352.99,-1375 389.93,-1411.94 473.94,-1411.94 491.32,-1429.31 491.32,-1514.68 483.82,-1522.18 386.18,-1522.18 371,-1507 371,-1476 358,-1463 -90,-1463 -101,-1452 -101,-1383 -93,-1375
  region net NetD3_1: 517,-1636 517,-1687 521,-1691 682,-1691 698,-1707 829,-1707 839,-1697 839,-1610 640.94,-1411.94 549.06,-1411.94 530.69,-1430.31 530.69,-1622.31
  region net +5V: 852,-530 853,-529 1004,-529 1022,-547 1022,-985 1012.47,-994.53 880.53,-994.53 871,-985 871,-706 852,-687
  region net NetC17_2: 479,-905 572,-905 581.78,-895.22 581.78,-754.22 662,-674 662,-486 648,-472 274,-472 265,-481 265,-695 288,-718 404,-718 415,-729 415,-825 430,-840 461,-840 473,-852 473,-899
  region net NetP13_1: -4194,-1045 -4193,-1044 -4102,-1044 -4102,-975 -4047,-920 -3659,-920 -3468,-729 -3468,-392 -3436,-360 -3093,-360 -3093,-761 -3328,-996 -3987,-996 -4013,-1022 -4013,-1097.09 -4037.91,-1122 -4200,-1122 -4211,-1111 -4211,-1052 -4204,-1045
  region net NetC22_1: -2549,-2106 -2540,-2097 -2540,-2005 -2558,-1987 -2866,-1987 -2921,-2042 -2921,-2515 -2862,-2574 -1976,-2574 -1873,-2677 -1873,-3593 -1858,-3608 -1724,-3608 -1712,-3596 -1712,-2614 -1886,-2440 -2763,-2440 -2824,-2379 -2824,-2135 -2795,-2106
  region net VCC: -2322,-3375 -2231,-3375 -2227,-3371 -2228,-3370 -2228,-3332 -2240,-3320 -2240,-3185 -2246,-3179 -2314,-3179 -2320,-3185 -2320,-3319 -2327,-3326 -2327,-3370
  region net VCC: -2890,-3370 -2787,-3370 -2786,-3369 -2786,-3330 -2805,-3311 -2805,-3169 -2811,-3163 -2880,-3163 -2883,-3166 -2883,-3297 -2895,-3309 -2895,-3365
  region net VCC: -2320,-2952 -2224,-2952 -2222,-2950 -2222,-2902 -2239,-2885 -2239,-2735 -2247,-2727 -2312,-2727 -2320,-2735 -2320,-2857 -2327,-2864 -2327,-2945
MidLayer2:
  rectangle net VCC: -2331,-2901 -2222,-2549
  rectangle net NetP13_6: -3501,-1648 -3183,-1320
  rectangle net NetP13_6: -3976,-1428 -3180,-1226
  rectangle net NetP13_6: -3976,-1683 -3784,-1292
  rectangle net NetP13_6: -4201,-1683 -3784,-1539
  rectangle net +5V: 956,-2233 1087,-544
  rectangle net +5V: 902,-2233 995.35,-2132
  rectangle net +5V: -249,-3392 88,-3260
  region net VCC: -2331,-2509 -869,-2509 -211,-1851 -211,-1850 84,-1555 84,-855 358,-855 363,-860 363,-946 353,-956 353,-1745 554,-1745 605,-1796 605,-1860 646,-1901 842,-1901 851,-1910 851,-2003 825,-2029 554,-2029 522,-1997 522,-1836 118,-1836 -762,-2716 -2331,-2716
Bottom Layer:
  rectangle net VCC: -3744,-1619 -3609,-468
  rectangle net VCC: -2334,-3343 -2215,-3176
  rectangle net VCC: -2899,-3335 -2796,-3088
  rectangle net VCC: -2898,-3375 -2214.61,-3252
  region net VCC: -3157,-2842 -2906,-2842 -2905,-2843 -2905,-3008 -2863,-3050 -2580,-3050 -2449,-2919 -2449,-2742 -2420,-2713 -2419,-2714 -2233,-2714 -2220.57,-2726.43 -2220.57,-2900.57 -2224,-2904 -2322,-2904 -2545,-3127 -3087,-3127 -3157,-3057

## Silkscreen, mask and mechanical layers (free items; w line width, h text height)
Top Overlay:
  circle w19.68: c1049.61,-67.13 r7.87
  circle w10: c-3916.34,-787.4 r157.48
  circle w10: c-313.98,-2867.23 r157.48
  circle w10: c479.45,-172.23 r157.48
  circle w10: c-2716.54,-2867.23 r157.48
  text "ISP" at 1063.82,-267.21 h40
  text "翻转" at -4242.95,-956.18 h40
  text "M-" at -4100,-1084 h40
  text "+5V" at -4143,-1200 h40
  text "A" at -4085,-1295 h40
  text "B" at -4074,-1397 h40
  text "GND" at -4011,-1476 h40
  text "M+" at -4008,-1617 h40
  text "M-" at -4058.19,-1807.4 h40
  text "GND" at -4071,-1869 h40
  text "A" at -4058.19,-1927.4 h40
  text "B" at -4058.19,-1987.4 h40
  text "+5V" at -4100,-2049 h40
  text "M+" at -4058.19,-2107.4 h40
  text "斜刀" at -4074,-2154 h40
  text "+5V" at 813.35,-2208.46 h40
  text "调刀" at -4235.79,-2243.19 h40
  text "GND" at 813.35,-2308.46 h40
  text "M-" at -4032.87,-2355.95 h40
  text "RX3" at 813.35,-2408.46 h40
  text "+5V" at -4081,-2443 h40
  text "TX3" at 813.35,-2508.46 h40
  text "A" at -4032.87,-2520.95 h40
  text "B" at -4032.87,-2590.95 h40
  text "GND" at -4032.87,-2675.95 h40
  text "M+" at -4043,-2765 h40
  text "夹紧" at -4134,-2888 h40
  text "M-" at -4041,-2937 h40
  text "+5V" at -4083,-3016 h40
  text "光纤" at -3348,-3079 h40
  text "A" at -4032.72,-3088.62 h40
  text "-" at -1443.19,-3101.09 h40
  text "+" at -1578,-3106 h40
  text "O" at -1523.19,-3108.07 h40
  text "B" at -4032.72,-3168.62 h40
  text "GND" at -4043,-3248 h40
  text "+" at -3188.58,-3294.77 h40
  text "M+" at -4032.72,-3328.62 h40
  text "电源输入" at -1880,-3354 h40
  text "-" at -3188.58,-3400.88 h40
  text "GND" at -1647,-3438 h40
  text "VCC" at -1838,-3440 h40
  text "IO" at -3186,-3564 h40
  text "光电开关" at -4112,-3568 h40
Mechanical 1:
  circle w1.97: c-1515.75,-787.4 r0.98
  circle w1.97: c-1515.75,-787.4 r0.98
  circle w1.97: c-1515.75,-787.4 r0.98
  circle w1.97: c-1515.75,-787.4 r0.98
Mechanical 15:
  lines w10: -960.67,-3464.57 -960.67,-2156.1 ; -879.92,-3464.57 -879.92,-2141.77 1240.16,-2141.77 ; -783.19,-2068.07 1240.16,-2068.07

## Dimensions
-4271.66,-39.37 to 1240.16,-39.37 on Top Overlay
-4232.29,0 to -4232.29,-3622.05 on Top Overlay

## Text inside footprints (layer, text, board x,y; h text height)
LS1: Top Overlay "+" at 648.59,-2275.18 h40 r270
P8: Top Overlay "1" at -974.19,-3554.19 h40 r180; Top Overlay "2" at -976.19,-3241.19 h40 r180
U12: Top Overlay "GND" at 563.81,-2773.07 h40 r270; Top Overlay "NC" at 514.37,-2773.07 h40 r270; Top Overlay "M0" at 464.92,-2773.07 h40 r270; Top Overlay "M1" at 415.48,-2773.07 h40 r270; Top Overlay "M2" at 366.03,-2773.07 h40 r270; Top Overlay "RXD" at 316.59,-2773.07 h40 r270; Top Overlay "TXD" at 267.14,-2773.07 h40 r270; Top Overlay "AUX" at 217.7,-2773.07 h40 r270; Top Overlay "VCC" at 168.25,-2773.07 h40 r270; Top Overlay "GND" at 118.81,-2773.07 h40 r270; Top Overlay "GND" at 123.81,-3258.07 h40 r270; Top Overlay "NC" at 173.25,-3258.07 h40 r270; Top Overlay "NC" at 222.7,-3258.07 h40 r270; Top Overlay "NC" at 272.14,-3258.07 h40 r270; Top Overlay "NC" at 321.59,-3258.07 h40 r270; Top Overlay "NC" at 371.03,-3258.07 h40 r270; Top Overlay "NC" at 420.48,-3258.07 h40 r270; Top Overlay "NC" at 469.92,-3258.07 h40 r270; Top Overlay "NC" at 519.37,-3258.07 h40 r270; Top Overlay "GND" at 568.81,-3258.07 h40 r270; Top Overlay "ANT" at 1093.81,-3028.07 h40 r270